# EAGLE board wifi-test-top (EAGLE 6.2)
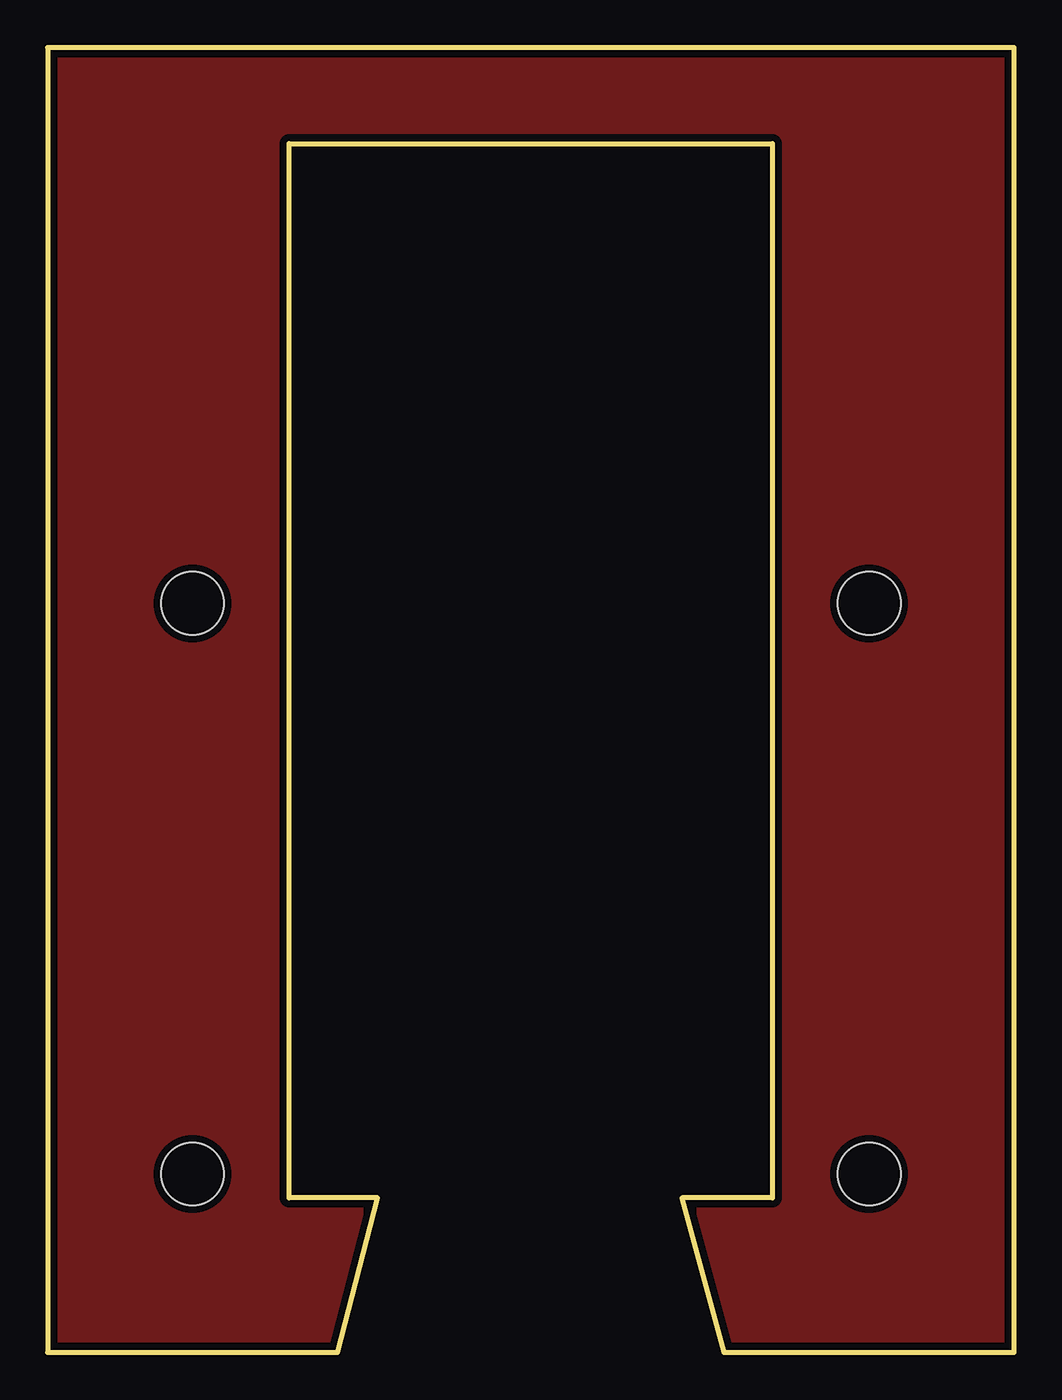
[diagram p0: board, top side]
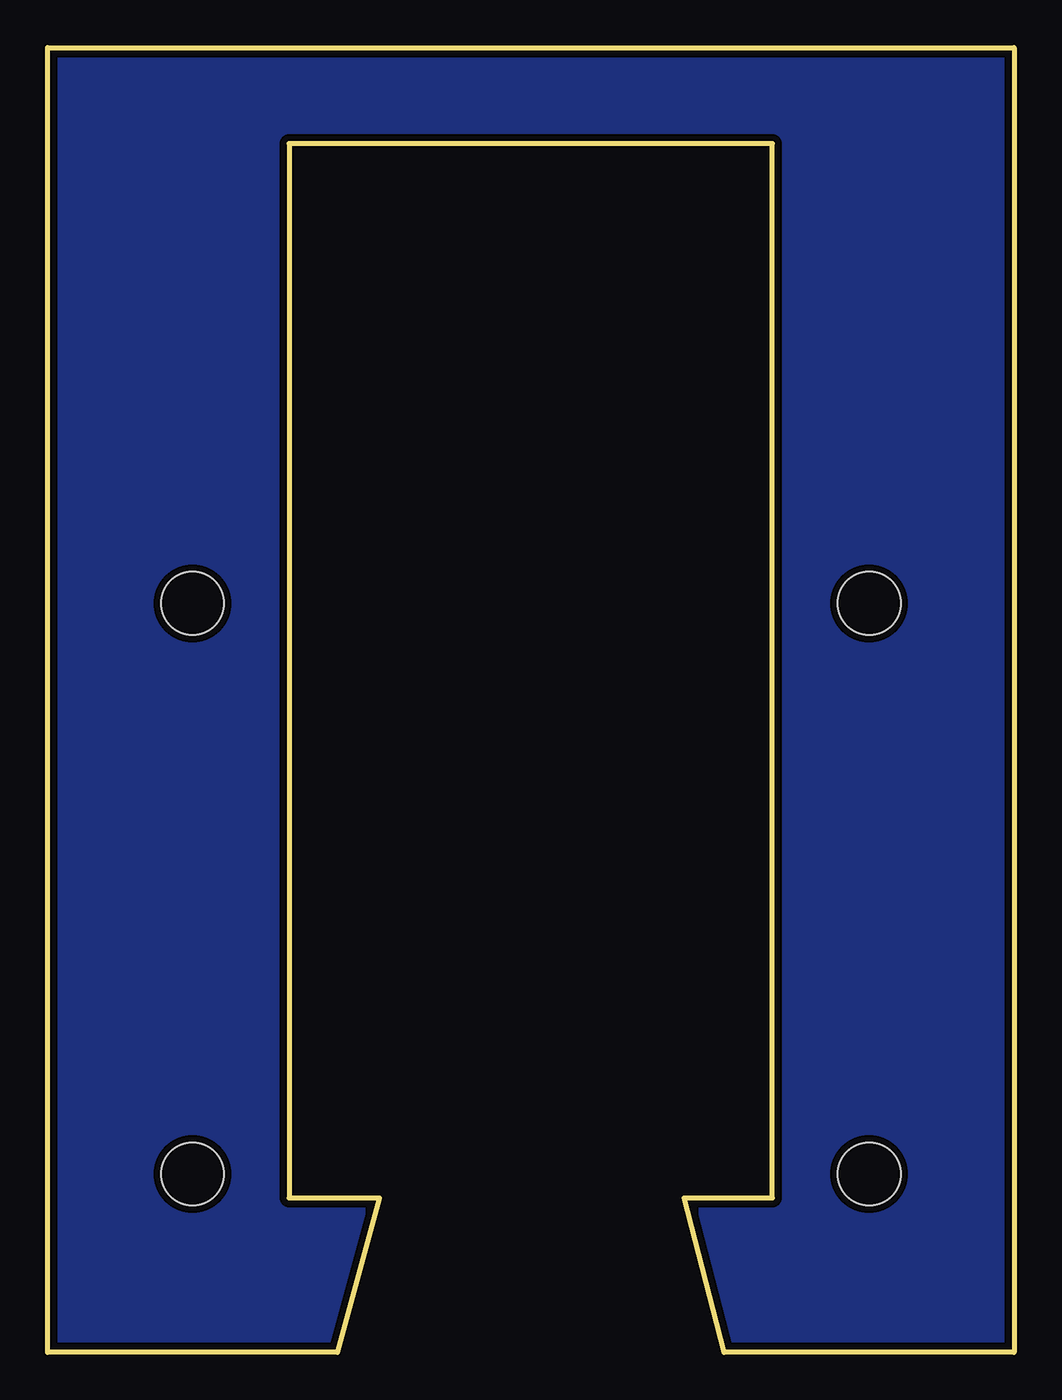
[diagram p1: board, bottom side, seen from below]

Size 50.8 x 68.58 mm. Coordinates in mm from the lower left corner, seen from the top.
Outline: 33.35,8.13 38.1,8.13 38.1,63.52 12.7,63.52 12.7,8.13 17.35,8.13 15.24,0 0,0 0,68.58 50.8,68.58 50.8,0 35.56,0 33.35,8.1
Copper layers (1*16): Top 0.0356mm / dielectric 1.5011mm / Bottom 0.0356mm
Design rules: minimum track width 6mil, minimum drill 13mil, track to track 6mil, track to pad 6mil, pad to pad 6mil, via to via 6mil, smd to smd 6mil, copper to edge 15mil, drill to drill 6mil, minimum pad ring 7mil, minimum via ring 7mil, stop-mask expansion 4mil, vias tented up to drill 16mil, thermal gap 10mil
Net classes: 0 Default: width 0.203 mm; 1 VCC: width 0.305 mm; 2 LEDPower: width 0.203 mm; 3 ButtonSignal: width 0.203 mm; 4 RF Antenna: width 0.305 mm; 5 GND: width 0.203 mm

## Footprints (pad centres in the part's own frame; a part is rotated, then mirrored left to right if it is on the bottom)
STAND-OFF = hole 3.302: 0,0

## Placement (x,y rotation side)
JP7  STAND-OFF  [STAND-OFF]  43.18,39.37 0 top
JP8  STAND-OFF  [STAND-OFF]  7.62,39.37 0 top
JP9  STAND-OFF  [STAND-OFF]  7.62,9.37 0 top
JP10  STAND-OFF  [STAND-OFF]  43.18,9.37 0 top

## Library data of the parts
JP7-JP10 = Pinoccio

## Tracks (layer width: path | path; a pad name or v marks a point on that pad's centre or on a via)
S$2
  pour Top: 0.3,68.45 50.7,68.4 50.75,0.13 35.76,0.25 33.58,7.92 38.18,8.08 38.25,63.75 12.34,63.75 12.47,7.92 17.2,7.92 15.04,0.2 0.15,0.33 0.23,68.33
S$3
  pour Bottom: 0.36,68.4 50.9,68.33 50.57,0.38 35.76,0.33 33.58,7.92 38.38,7.92 38.25,63.68 12.47,63.75 12.62,8.08 17.4,8.08 15.11,0.2 -0.03,0.2 0.15,68.33

## Text on the board
tDocu: Pinoccio(tm) Wi-Fi Test Jig - Top v1.0 | Design by: Eric Jennings for Pinoccio | http://pinocc.io | Licensed under CERN OHL v.1.1